# EAGLE board M0 DC Closed Loop Servo (EAGLE 8.0.0)
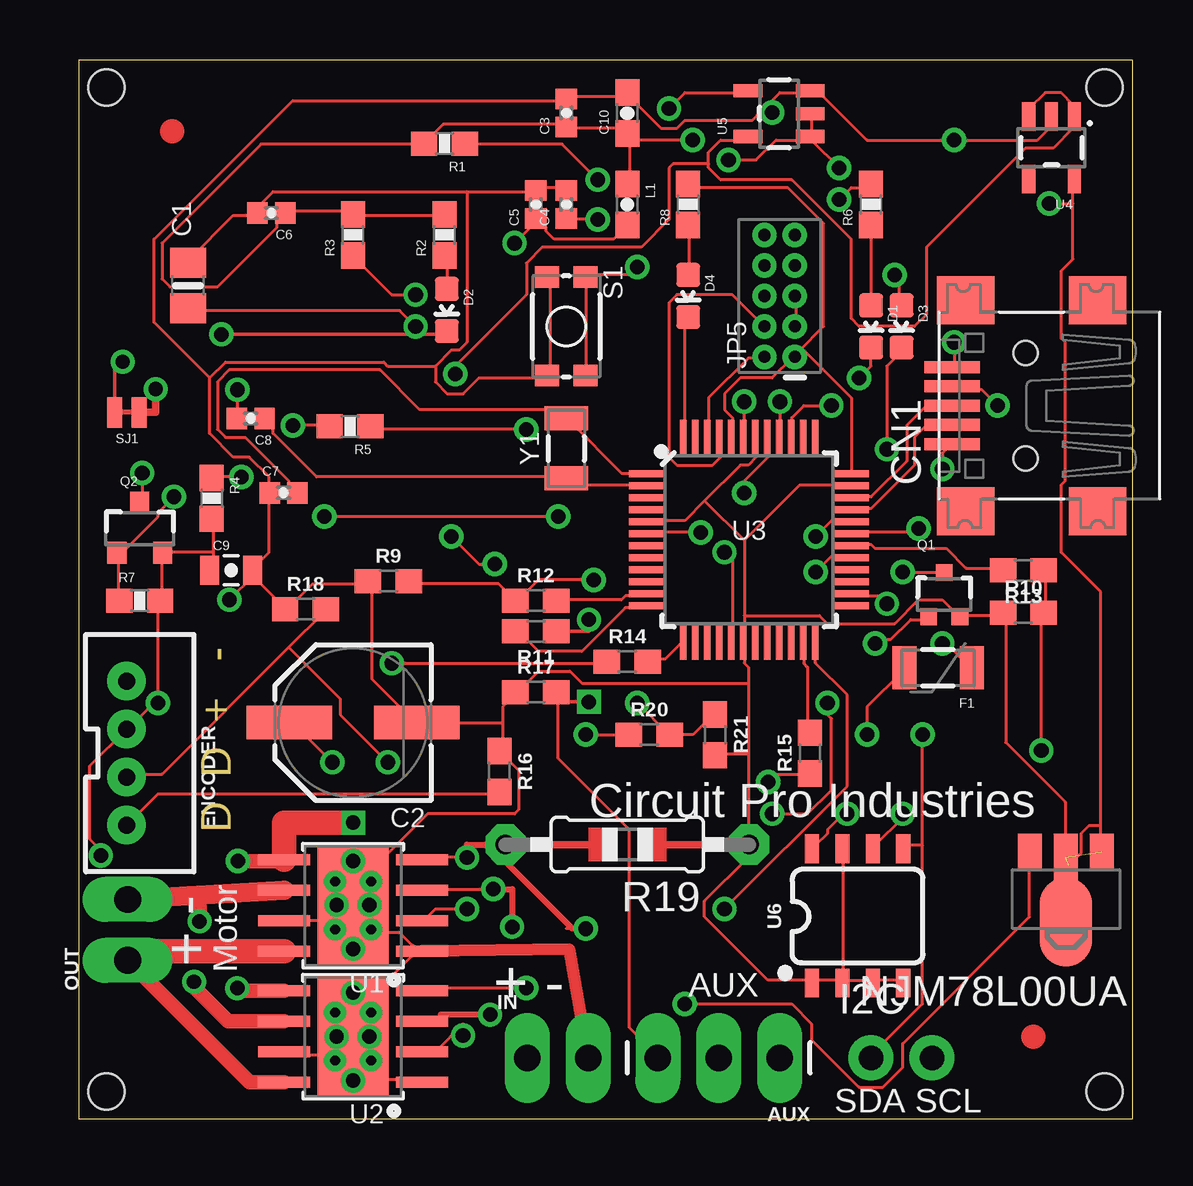
[diagram p0: board, top side]
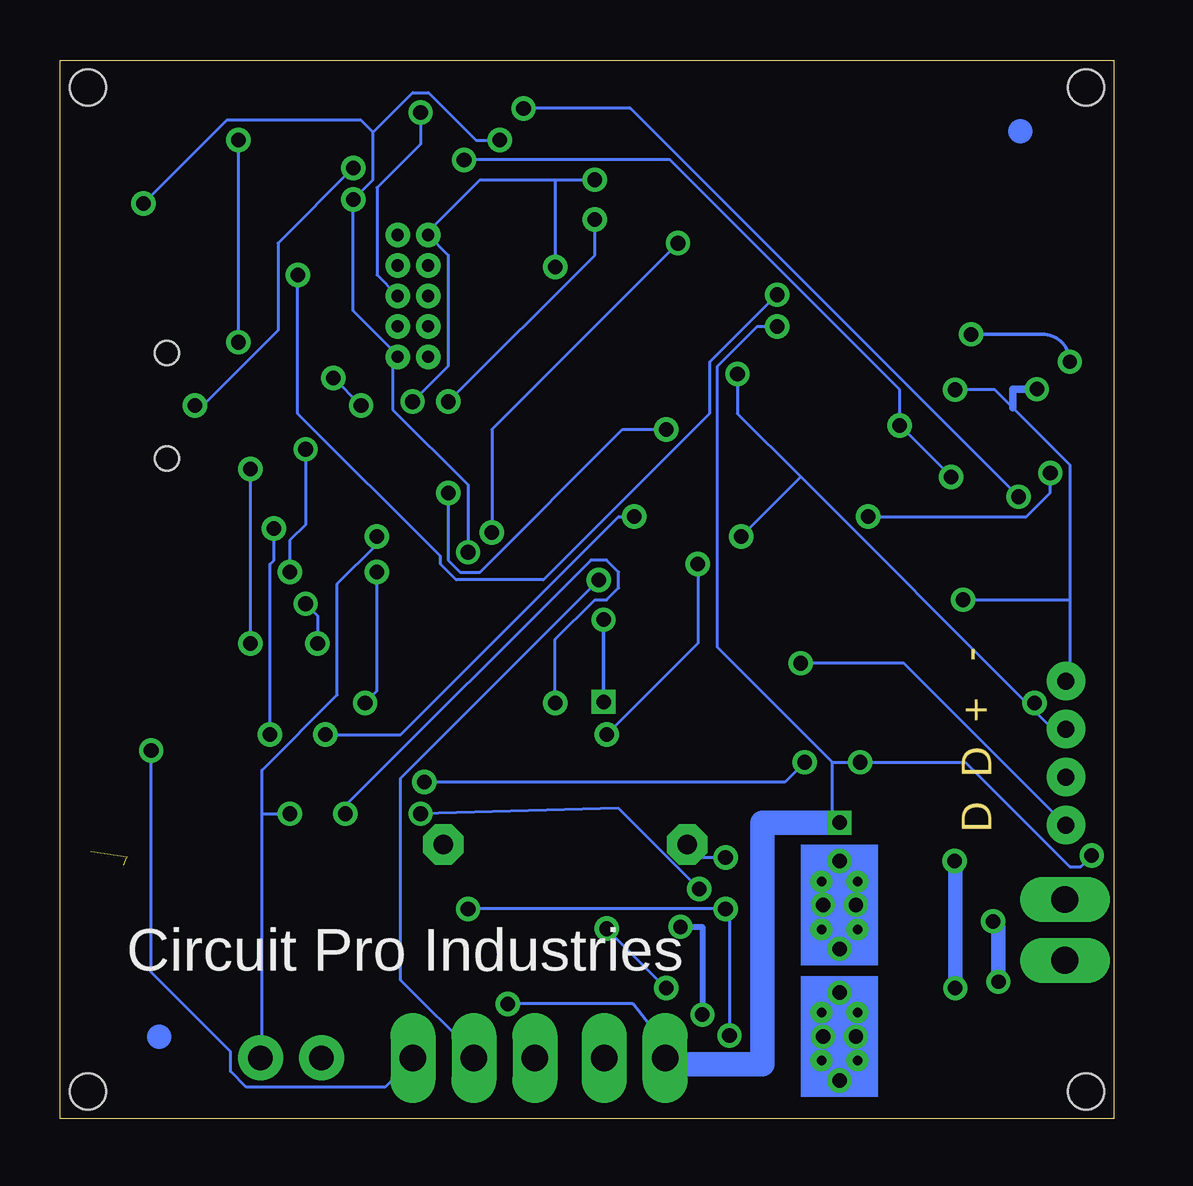
[diagram p1: board, bottom side, seen from below]

Size 43.92 x 44.12 mm. Coordinates in mm from the lower left corner, seen from the top.
Outline: 0,0 43.92,0 43.92,44.12 0,44.12 0,0
Copper layers (1*16): Top 0.035mm / dielectric 1.5mm / Bottom 0.035mm
Design rules "default *": minimum track width 5mil, minimum drill 24mil, track to track 8mil, track to pad 8mil, pad to pad 8mil, via to via 8mil, smd to smd 8mil, copper to edge 40mil, drill to drill 8mil, minimum pad ring 10mil, minimum via ring 8mil, stop-mask expansion 4mil, vias tented up to drill 0mil, thermal gap 10mil
Holes 1.5 mm at 42.75,42.98 1.14,42.98 1.14,1.14 42.75,1.14

## Footprints (pad centres in the part's own frame; a part is rotated, then mirrored left to right if it is on the bottom)
1X03_LONGPADS = drill 1.118 pad 1.88 long: 1 0,0; 2 2.54,0; 3 5.08,0
0805-NO = smd 1.24 x 1.5: 1 -0.95,0; 2 0.95,0
PANASONIC_D = smd 3.556 x 1.4: + 2.654,0; - -2.654,0
0402-CAP = smd 0.85 x 0.9: 1 -0.58,0; 2 0.58,0
0805-CAP = smd 0.8 x 1.2: 1 -0.9,0; 2 0.9,0
0603-CAP = smd 1.1 x 1: 1 -0.85,0; 2 0.85,0
USB-MINIB = smd 0.5 x 2.308: D+ 0,4.064; D- -0.8,4.064; GND 1.6,4.064; ID 0.8,4.064; VBUS -1.6,4.064 | smd 2 x 2.4: GND1 -4.4,-2; GND2 -4.4,3.5; GND3 4.4,3.5; GND4 4.4,-2 | hole 1: -2.2,1; 2.2,1
LED-0603 = smd 1 x 1: A 0,-0.877; C 0,0.877
JST-4-PTH-VERT = drill 0.7 pad 1.6: 1 -3,-0.55; 2 -1,-0.55; 3 1,-0.55; 4 3,-0.55
PTC-1206 = smd 1 x 1.8: 1 -1.4,0; 2 1.4,0
1X02_NO_SILK@1 = drill 1.016 pad 1.88: 1 0,0; 2 2.54,0
1X02_LONGPADS = drill 1.118 pad 1.88 long: 1 0,0; 2 2.54,0
2X5-PTH-1.27MM = drill 0.508 pad 1: 1 -2.54,-0.635; 2 -2.54,0.635; 3 -1.27,-0.635; 4 -1.27,0.635; 5 0,-0.635; 6 0,0.635; 7 1.27,-0.635; 8 1.27,0.635; 9 2.54,-0.635; 10 2.54,0.635
0603 = smd 1.1 x 1: 1 -0.85,0; 2 0.85,0
SOT89 = smd 1 x 1.5: 1 -1.499,-1.981; 3 1.499,-1.981 | smd 1 x 2: 2 0,-1.727 | smd 2.2 x 3.7: 2@1 0,0.94
SOT323 = smd 0.7 x 0.7: 1 -0.65,-0.925; 2 0.65,-0.925; 3 0,0.925
SOT23-3 = smd 0.8 x 0.9: 1 -0.95,-1; 2 0.95,-1; 3 0,1.1
0603-RES = smd 1.1 x 1: 1 -0.85,0; 2 0.85,0
0805-THM = drill 0.813 pad 1.676 octagon: 1 -5.08,0; 2 5.08,0
TACTILE_SWITCH_SMD_4.6X2.8MM = smd 0.9 x 1: 1 -2.05,-0.8; 2 2.05,-0.8; 3 2.05,0.8; 4 -2.05,0.8
PAD-JUMPER-2-NC_BY_TRACE_NO_SILK = smd 0.635 x 1.27: 1 -0.508,0; 2 0.508,0
HSOP8 = smd 0.45 x 2.15: 1 -1.905,-2.875; 2 -0.635,-2.875; 3 0.635,-2.875; 4 1.905,-2.875; 5 1.905,2.875; 6 0.635,2.875; 7 -0.635,2.875; 8 -1.905,2.875 | smd 4.9 x 2.95: GND 0,0 | drill 0.4: P$1 -1,0.75; P$2 -1,-0.75; P$3 1,-0.75; P$4 1,0.75
TQFP-48 = smd 1.5 x 0.28: 1 -4.25,2.75; 2 -4.25,2.25; 3 -4.25,1.75; 4 -4.25,1.25; 5 -4.25,0.75; 6 -4.25,0.25; 7 -4.25,-0.25; 8 -4.25,-0.75; 9 -4.25,-1.25; 10 -4.25,-1.75; 11 -4.25,-2.25; 12 -4.25,-2.75; 25 4.25,-2.75; 26 4.25,-2.25; 27 4.25,-1.75; 28 4.25,-1.25; 29 4.25,-0.75; 30 4.25,-0.25; 31 4.25,0.25; 32 4.25,0.75; 33 4.25,1.25; 34 4.25,1.75; 35 4.25,2.25; 36 4.25,2.75 | smd 0.28 x 1.5: 13 -2.75,-4.25; 14 -2.25,-4.25; 15 -1.75,-4.25; 16 -1.25,-4.25; 17 -0.75,-4.25; 18 -0.25,-4.25; 19 0.25,-4.25; 20 0.75,-4.25; 21 1.25,-4.25; 22 1.75,-4.25; 23 2.25,-4.25; 24 2.75,-4.25; 37 2.75,4.25; 38 2.25,4.25; 39 1.75,4.25; 40 1.25,4.25; 41 0.75,4.25; 42 0.25,4.25; 43 -0.25,4.25; 44 -0.75,4.25; 45 -1.25,4.25; 46 -1.75,4.25; 47 -2.25,4.25; 48 -2.75,4.25
SOT23-5 = smd 0.55 x 1.2: 1 -0.95,-1.3; 2 0,-1.3; 3 0.95,-1.3; 4 0.95,1.3; 5 -0.95,1.3
SO08 = smd 0.6 x 1.2: 1 -1.905,-2.8; 2 -0.635,-2.8; 3 0.635,-2.8; 4 1.905,-2.8; 5 1.905,2.8; 6 0.635,2.8; 7 -0.635,2.8; 8 -1.905,2.8
CRYSTAL-SMD-3.2X1.5MM = smd 1 x 1.8: P$1 -1.25,0; P$2 1.25,0

## Placement (x,y rotation side)
AUX  [1X03_LONGPADS]  29.21,2.54 180 top
C1  0.1uF/50V  [0805-NO]  4.55,34.72 90 top
C2  22uF/63V  [PANASONIC_D]  11.43,16.51 180 top
C3  0.1uF  [0402-CAP]  20.32,41.91 90 top
C4  0.1uF  [0402-CAP]  20.32,38.1 90 top
C5  0.1uF  [0402-CAP]  19.05,38.1 90 top
C6  0.1uF  [0402-CAP]  8.03,37.74 180 top
C7  15pF  [0402-CAP]  8.53,26.09 0 top
C8  15pF  [0402-CAP]  7.16,29.18 180 top
C9  1.0uF  [0805-CAP]  6.35,22.86 0 top
C10  2.2uF  [0603-CAP]  22.86,41.91 90 top
CN1  [USB-MINIB]  40.46,29.72 90 top
D1  GREEN  [LED-0603]  33.02,33.02 180 top
D2  RED  [LED-0603]  15.34,33.71 180 top
D3  BLUE  [LED-0603]  34.29,33.02 180 top
D4  Yellow  [LED-0603]  25.4,34.29 180 top
ENCODER  [JST-4-PTH-VERT]  2.54,15.24 270 top
F1  500mA  [PTC-1206]  35.81,18.8 180 top
I2C  [1X02_NO_SILK@1]  33.02,2.54 0 top
IN  [1X02_LONGPADS]  18.69,2.54 0 top
JP5  CORTEX_DEBUGPTH  [2X5-PTH-1.27MM]  29.21,34.29 90 top
L1  FB - 30Ohm  [0603]  22.86,38.1 270 top
NJM78L00UA  AP1117Y33G-13  [SOT89]  41.15,9.14 180 top
OUT  [1X02_LONGPADS]  2.03,6.6 90 top
Q1  2N7002PW  [SOT323]  36.07,21.84 0 top
Q2  2.5A/30V  [SOT23-3]  2.54,24.59 0 top
R1  10K  [0603-RES]  15.24,40.64 180 top
R2  330  [0603-RES]  15.24,36.83 90 top
R3  330  [0603-RES]  11.43,36.83 90 top
R4  100k  [0603-RES]  5.54,25.86 270 top
R5  330  [0603-RES]  11.3,28.85 180 top
R6  330  [0603-RES]  33.02,38.1 90 top
R7  47K  [0603-RES]  2.54,21.59 0 top
R8  330  [0603-RES]  25.4,38.1 90 top
R9  2.0k  [0603]  12.9,22.4 0 top
R10  2.0k  [0603]  39.37,21.08 0 top
R11  1k  [0603]  19.05,20.32 180 top
R12  1k  [0603]  19.05,21.59 0 top
R13  1k  [0603]  39.37,22.86 180 top
R14  1k  [0603]  22.86,19.05 0 top
R15  1k  [0603]  30.48,15.24 90 top
R16  2.0k  [0603]  17.53,14.48 270 top
R17  2.0k  [0603]  19.05,17.78 0 top
R18  2.0k  [0603]  9.45,21.23 0 top
R19  30K  [0805-THM]  22.86,11.43 180 top
R20  10k  [0603]  23.77,16 0 top
R21  10k  [0603]  26.52,16 270 top
S1  RESET  [TACTILE_SWITCH_SMD_4.6X2.8MM]  20.32,33.02 270 top
SJ1  PWR-LED  [PAD-JUMPER-2-NC_BY_TRACE_NO_SILK]  2.01,29.44 180 top
U1  DRV8871  [HSOP8]  11.43,8.89 90 top
U2  DRV8871  [HSOP8]  11.43,3.43 90 top
U3  ATSAMD21G-A  [TQFP-48]  27.94,24.13 0 top
U4  3.3V  [SOT23-5]  40.54,40.46 180 top
U5  74AHC1G125  [SOT23-5]  29.18,41.88 90 top
U6  24LC256  [SO08]  32.46,8.46 0 top
U$7  [CIRCLE-1MM-3R]  39.78,3.43 0 top
U$8  [CIRCLE-1MM-3R]  3.89,41.15 0 top
Y1  32.768kHz  [CRYSTAL-SMD-3.2X1.5MM]  20.32,27.94 90 top

## Library data of the parts
AUX I2C IN OUT = SparkFun-Connectors
C1 C2 U1 U2 = microbuilder
C3-C6 = SparkFun-Capacitors; PROD_ID: CAP-12416
C7 C8 = samd21-temp; PROD_ID: CAP-13063
C9 = SparkFun-Capacitors; PROD_ID: CAP-11625
C10 = SparkFun-Capacitors; PROD_ID: CAP-07888
CN1 R19 = adafruit
D1 = SparkFun-LED; PROD_ID: DIO-00821
D2 = SparkFun-LED; PROD_ID: DIO-00819
D3 = SparkFun-LED; PROD_ID: DIO-08575
D4 = SparkFun-LED; PROD_ID: DIO-09003
ENCODER = SparkFun-Connectors; PROD_ID: CONN-13251
F1 = SparkFun-PowerIC; PROD_ID: RES-11150
JP5 = samd21-temp
L1 = SparkFun-Passives; PROD_ID: RES-07859
NJM78L00UA = AP1117Y33G-13
Q1 = SparkFun-DiscreteSemi; PROD_ID: TRANS-11151
Q2 = SparkFun-DiscreteSemi; PROD_ID: TRANS-11308
R1 R20 R21 = SparkFun-Resistors; PROD_ID: RES-00824
R2 R3 R5 R6 R8 = SparkFun-Resistors; PROD_ID: RES-00818
R4 = SparkFun-Resistors; PROD_ID: RES-07828
R7 = SparkFun-Resistors; PROD_ID: RES-07871
R9 R10 R16-R18 = SparkFun-Resistors; PROD_ID: RES-08296
R11-R15 = SparkFun-Resistors; PROD_ID: RES-07856
S1 = samd21-temp; PROD_ID: SWCH-13065
SJ1 = SparkFun-Passives
U3 = samd21-temp; PROD_ID: IC-13064
U4 = SparkFun-PowerIC; PROD_ID: VREG-12457
U5 = SparkFun-DigitalIC; PROD_ID: IC-11920
U6 = SparkFun-IC-Memory; PROD_ID: IC-09714
U$7 U$8 = fiducial
Y1 = samd21-temp; PROD_ID: XTAL-13062

## Nets
3.3V: C3.1 C6.1 C10.1 JP5.1 L1.1 NJM78L00UA.2 NJM78L00UA.2@1 R1.2 R2.2 R3.2 R6.2 R8.2 U3.17 U3.36 U3.44 U4.5
!RESET: JP5.10 R1.1 S1.3 S1.4 U3.40
A0: U3.3
A1: U3.7
A2: U3.8
A3: U3.9
AREF: U3.4
D0/RXI: U3.16
D1/TXO: U3.15
D2: R15.2 U3.23
D3: U3.14
D4: R14.2 U3.13
D5: U1.2 U2.2 U3.24
D6: U1.3 U2.3 U3.29
D7: R13.2 U3.30
D8: R12.2 U3.11
D9: R11.2 U3.12
D10/SS: U3.27
D11/MOSI: U3.25
D12/MISO: U3.28
D13/SCK: Q1.1 U3.26
ENCODER: ENCODER.3 R15.1 R18.2
GND: C1.2 C2.- C3.2 C4.2 C5.2 C6.2 C7.1 C8.2 C9.2 C10.2 CN1.GND ENCODER.1 IN.2 JP5.3 JP5.5 NJM78L00UA.1 Q1.2 R9.1 R10.1 R16.1 R17.1 R18.1 R19.1 R21.2 S1.1 S1.2 SJ1.1 U1.1 U1.7 U1.GND U1.P$1 U1.P$2 U1.P$3 U1.P$4 U2.1 U2.7 U2.GND U2.P$1 U2.P$2 U2.P$3 U2.P$4 U3.5 U3.18 U3.35 U3.42 U4.2 U5.3 U6.1 U6.2 U6.3 U6.4 U6.7
MVIN: C1.1 C2.+ ENCODER.2 IN.1 NJM78L00UA.3 U1.5 U2.5
N$1: CN1.VBUS F1.1
N$2: C7.2 U3.1 Y1.P$2
N$3: D3.C Q1.3
N$4: C8.1 U3.2 Y1.P$1
N$5: D2.A R2.1
N$6: D3.A R3.1
N$7: F1.2 Q2.3
N$8: CN1.ID R4.1 R5.2 U5.1 U5.2
N$9: Q2.1 R7.1 U5.4
N$10: D1.A R6.1
N$11: D4.A R8.1
N$12: D2.C SJ1.2
N$14: AUX.3 R11.1 R17.2
N$15: R20.2 R21.1 U6.8
N$16: AUX.2 R9.2 R12.1
N$17: AUX.1 R10.2 R13.1
N$18: ENCODER.4 R14.1 R16.2
N$20: R19.2 U1.4 U2.4
OUT1: OUT.2 U1.6 U2.6
OUT2: OUT.1 U1.8 U2.8
RX_LED: D4.C U3.48
SCL: I2C.2 U3.32 U6.6
SDA: I2C.1 U3.31 U6.5
SWCLK: JP5.4 U3.45
SWDIO: JP5.2 U3.46
TX_LED: D1.C U3.39
USB_D+: CN1.D+ U3.34
USB_D-: CN1.D- U3.33
USB_HOST_EN: R5.1 U3.41
VDDANA: C5.1 L1.2 U3.6
VDDCORE: C4.1 U3.43
VIN: C9.1 Q2.2 R4.2 R7.2 R20.1 U4.1 U4.3 U5.5

## Tracks (layer width: path | path; a pad name or v marks a point on that pad's centre or on a via)
3.3V  (via drill 0.61)  (1 unrouted)
  Top 0.127: 41.44,38.14 41.44,35.83 40.95,35.33 40.95,32.52 41.11,32.36 41.11,26.58 40.95,26.42 40.95,23.61 42.6,21.96 42.6,12.22 | 41.44,38.14 41.44,39.13 U4.5 | 42.6,11.23 42.6,12.22 | R2.2 15.19,37.64 11.56,37.64 R3.2 11.39,37.81 8.75,37.81 C6.1 8.59,37.64 8.26,37.31 8.26,37.15 5.78,34.67 3.8,34.67 3.47,35 3.47,36.49 7.59,40.62 14.36,40.62 R1.2 14.53,40.78 15.19,41.44 20.31,41.44 C3.1 20.47,41.27 22.62,41.27 22.78,41.11 C10.1 | 22.95,40.78 22.95,40.95 C10.1 | 22.95,40.78 22.95,38.96 L1.1 | 30.05,32.03 29.88,31.86 JP5.1 | 30.05,32.03 31.04,33.02 31.04,37.31 29.55,38.8 25.43,38.8 R8.2 | v31.7,38.3 32.19,38.8 33.02,38.8 R6.2 | v26.91,23.61 27.24,23.28 27.24,19.98 U3.17 | 30.05,32.03 30.21,32.03 32.19,30.05 32.19,26.91 U3.36 | 30.05,32.03 JP5.1 | U3.44 27.24,28.4 27.24,29.22 26.91,29.55 26.91,30.21 27.57,30.87 28.89,30.87 29.72,31.7 JP5.1 | v25.59,40.78 22.95,40.78 | 22.95,40.78 C10.1 | v40.45,38.14 41.44,38.14 | 42.6,12.22 42.1,12.22 41.77,11.89 41.77,11.06 41.27,10.57 41.27,8.26 NJM78L00UA.2@1
  Bottom 0.127: v26.91,23.61 26.91,26.42 30.05,29.55 30.05,31.53 29.88,31.7 JP5.1 29.88,31.86 31.7,33.68 v31.7,38.3 30.87,39.13 30.87,41.11 | v25.59,40.78 26.58,40.78 28.56,42.76 29.22,42.76 30.87,41.11 | v40.45,38.14 36.98,41.6 31.37,41.6 30.87,41.11
!RESET  (via drill 0.61)
  Top 0.127: S1.3 21.13,31.04 21.13,35 S1.4 21.13,35.17 22.95,35.17 v23.28,35.5 | v21.63,39.13 20.14,40.62 16.18,40.62 R1.1 | v29.22,29.88 29.22,28.4 U3.40
  Bottom 0.127: 23.28,39.13 26.42,39.13 28.56,36.98 JP5.10 27.74,35.99 27.74,31.37 v29.22,29.88 | 23.28,39.13 v21.63,39.13 | 23.28,39.13 v23.28,35.5
D2
  Top 0.127: R15.2 30.38,16.18 30.38,18.82 30.21,18.99 30.21,19.81 U3.23
D4
  Top 0.127: R14.2 23.77,19.15 24.43,19.15 25.09,19.81 U3.13
D5  (via drill 0.61)
  Top 0.127: v26.91,8.75 32.03,13.87 32.03,17.67 30.71,18.99 30.71,19.81 U3.24 | v16.18,8.75 14.86,8.75 14.36,8.26 U1.2 | v16.02,3.48 16.02,3.96 14.86,2.81 14.36,2.81 U2.2
  Bottom 0.127: v26.91,8.75 v16.18,8.75 16.02,8.59 v16.02,3.48
D6  (via drill 0.6, 0.61)
  Top 0.127: v30.71,22.78 31.37,23.44 32.03,23.44 U3.29 | v31.2,17.34 31.2,16.84 31.37,16.68 31.37,13.7 30.38,12.71 v28.89,12.71 | v17.27,9.58 14.36,9.58 U1.3
  Top 0.254: v17.27,9.58 18.06,9.58 v18.06,8 | v17.14,4.34 15.09,4.34 15.09,4.12 14.3,4.12 U2.3
  Bottom 0.127: v30.71,22.78 30.71,17.83 v31.2,17.34 | v28.89,12.71 20.64,12.94 v17.27,9.58
  Bottom 0.254: v18.06,8 17.14,8 v17.14,4.34
D7
  Top 0.127: R13.2 38.47,22.95 36.98,22.95 36.16,23.77 33.19,23.77 33.02,23.94 32.19,23.94 U3.30
D8
  Top 0.127: R12.2 19.98,21.63 22.62,21.63 22.78,21.79 23.61,21.79 U3.11
D9
  Top 0.127: R11.2 18.33,20.31 19.15,19.48 20.97,19.48 22.78,21.3 23.61,21.3 U3.12
D13/SCK  (via drill 0.61)
  Top 0.127: v33.19,19.81 33.35,19.98 33.85,19.98 34.67,20.8 35.33,20.8 Q1.1 | v33.68,21.46 33.35,21.79 32.19,21.79 U3.26
  Bottom 0.127: v33.19,19.81 33.19,20.97 v33.68,21.46
ENCODER  (via drill 0.61)
  Top 0.127: 8.75,19.65 3.47,14.36 2.15,14.36 ENCODER.3 | 8.75,19.65 10.24,21.13 R18.2 | v28.73,14.03 29.06,14.36 30.38,14.36 R15.1 | v12.88,14.86 10.9,16.84 10.9,17.5 8.75,19.65
  Bottom 0.127: v28.73,14.03 13.7,14.03 v12.88,14.86
GND  (via drill 0.6, 0.61)  (1 unrouted)
  Top 0.127: 26.09,25.76 27.57,27.24 27.9,27.24 28.23,27.57 28.23,28.23 U3.42 | 26.09,25.76 25.26,24.93 23.77,24.93 U3.5 | 27.74,24.11 27.74,20.97 | 27.74,20.97 27.74,19.98 U3.18 27.74,19.81 27.74,18.99 27.9,18.82 27.9,18.16 | 26.09,25.76 27.74,24.11 | 27.74,24.11 30.05,26.42 32.03,26.42 U3.35 | 27.74,20.97 30.87,20.97 31.2,20.64 34.01,20.64 35,21.63 35.99,21.63 36.65,20.97 Q1.2 36.82,20.97 38.47,20.97 R10.1 38.63,20.97 38.63,15.68 41.11,13.21 41.11,10.9 | 27.9,18.16 27.9,15.19 | 27.9,15.19 27.9,11.56 R19.1 27.9,11.39 27.9,10.9 26.09,9.08 26.09,8.42 28.73,5.78 30.54,5.78 U6.1 30.71,5.78 31.7,5.78 U6.2 31.86,5.78 | JP5.3 29.88,33.02 29.88,34.18 JP5.5 | 28.4,41.94 28.07,41.6 25.26,41.6 24.93,41.27 24.27,41.27 22.95,42.6 C10.2 22.78,42.6 20.47,42.6 C3.2 20.31,42.43 8.91,42.43 3.14,36.65 3.14,33.19 5.45,30.87 | 28.4,41.94 29.22,42.76 30.38,42.76 U5.3 30.54,42.76 30.87,42.76 32.85,40.78 v36.49,40.78 39.95,40.78 40.45,41.27 40.45,41.6 U4.2 | v36.49,32.36 36.49,31.37 CN1.GND | 28.4,41.94 v28.89,41.94 | S1.1 19.65,35 19.65,31.04 S1.2 19.48,30.87 16.68,30.87 16.02,30.21 15.35,30.21 14.86,30.71 14.86,31.37 | C4.2 20.31,38.8 19.15,38.8 C5.2 18.99,38.63 16.18,38.63 | C1.2 4.62,35.83 6.44,37.64 7.43,37.64 C6.2 7.59,37.81 7.59,38.14 8.09,38.63 16.18,38.63 | 14.86,31.37 15.52,32.03 15.85,32.03 16.18,32.36 16.18,38.63 | v6.6,30.38 6.6,29.22 C8.2 | 11.39,8.59 11.56,8.75 U1.GND | 11.39,8.59 10.73,7.92 U1.P$1 10.57,7.92 10.24,8.26 U1.7 | 11.39,9.08 11.56,8.91 U1.GND | 11.39,9.08 10.73,9.74 U1.P$4 | 11.39,8.59 12.05,7.92 U1.P$2 12.22,7.76 13.37,7.76 13.87,7.26 U1.1 13.87,6.77 12.22,5.12 12.22,4.46 U2.P$3 12.05,4.29 11.39,3.63
  Top 0.127: 11.39,8.59 U1.GND | 11.39,9.08 12.05,9.74 U1.P$3 12.22,9.91 12.22,10.4 14.53,12.71 18.16,12.71 18.33,12.88 18.33,14.53 17.67,15.19 R16.1 17.67,15.35 17.67,16.51 | 11.39,9.08 U1.GND | 7.92,26.09 7.92,23.61 7.26,22.95 C9.2 | 7.26,22.62 7.1,22.78 C9.2 | 7.26,22.62 8.59,21.3 R18.1 8.75,21.3 9.74,22.29 12.05,22.29 R9.1 12.22,22.29 12.22,18.33 14.03,16.51 C2.- 17.67,16.51 | 17.67,16.51 17.67,17.17 18.16,17.67 R17.1 18.33,17.83 19.15,18.66 20.47,18.66 20.97,18.16 27.9,18.16 | 7.26,22.62 v6.27,21.63 | 7.26,22.62 C9.2 | 14.86,31.37 12.88,31.37 12.71,31.53 6.11,31.53 5.45,30.87 | 5.45,30.87 5.45,28.56 6.44,27.57 7.1,27.57 7.92,26.75 7.92,26.09 | 7.92,26.09 C7.1 | 11.39,3.14 11.56,3.3 U2.GND | 11.39,3.14 10.73,2.48 U2.P$1 10.57,2.48 10.4,2.64 8.59,2.64 U2.7 | 11.39,3.63 11.56,3.47 U2.GND | 11.39,3.63 10.73,4.29 U2.P$4 | 11.39,3.14 12.05,2.48 U2.P$2 12.22,2.31 12.88,1.65 14.2,1.65 U2.1 | 11.39,3.14 U2.GND | 11.39,3.63 U2.GND | U6.4 34.34,5.78 33.19,5.78 U6.3 33.02,5.78 31.86,5.78 | 27.9,15.19 26.58,15.19 R21.2 | 31.86,5.78 31.86,11.23 U6.7
  Top 0.305: SJ1.1 3.2,29.44 v3.2,30.4
  Top 0.508: IN.2 20.45,7.06 U1.1
  Bottom 0.127: v36.49,40.78 v36.49,32.36 | v28.89,41.94 28.89,40.62 30.71,38.8 30.71,35.17 29.88,34.34 JP5.5 | v6.6,30.38 4.95,30.38 4.2,29.63 1.82,27.24 1.82,21.63 | 1.82,21.63 1.82,18.49 1.98,18.33 ENCODER.1 | v6.27,21.63 1.82,21.63
  Bottom 0.305: v3.2,30.4 4.2,30.4 4.2,29.63
MVIN  (via drill 0.6, 0.61)
  Top 0.127: v14.03,33.02 13.37,33.68 4.62,33.68 C1.1 | v25.26,4.79 29.72,4.79 30.54,3.96 30.54,3.3 32.52,1.32 33.52,1.32 34.34,2.15 34.34,3.14 39.62,8.42 39.62,11.06 NJM78L00UA.3 | v10.57,14.86 8.91,16.51 C2.+ | v6.6,5.45 8.42,5.45 U2.5 | v0.91,10.97 0.91,11.2 0.46,11.66 0.46,14.71 ENCODER.2
  Top 0.61: U2.5 6.72,5.33 v6.6,5.45 | v6.63,10.74 8.5,10.74 U1.5
  Top 1.016: v11.43,12.34 8.55,12.34 U1.5
  Bottom 0.127: v14.03,33.02 14.86,33.02 16.51,31.37 16.51,19.65 11.72,14.86 | 11.72,14.86 11.72,12.71 v11.43,12.34 | v25.26,4.79 20.04,4.79 19.14,3.66 IN.1 | 11.72,14.86 v10.57,14.86 6.17,14.86 1.83,10.52 1.37,10.52 v0.91,10.97
  Bottom 0.61: v6.6,5.45 6.6,10.72 v6.63,10.74
  Bottom 1.016: v11.43,12.34 14.63,12.34 14.63,2.29 17.78,2.29 IN.1
N$1  (via drill 0.61)
  Top 0.127: v35.99,19.81 36.16,19.81 37.15,18.82 F1.1 | v35.99,27.08 35.99,27.74 36.32,28.07 CN1.VBUS
  Bottom 0.127: v35.99,27.08 v35.99,19.81
N$2
  Top 0.127: C7.2 9.08,26.09 8.75,26.42 8.75,26.58 6.93,28.4 6.11,28.4 5.78,28.73 5.78,30.71 6.27,31.2 12.55,31.2 14.2,29.55 19.98,29.55 20.31,29.22 Y1.P$2 20.47,29.06 22.62,26.91 23.61,26.91 U3.1
N$3  (via drill 0.61)
  Top 0.127: v34.34,22.78 35.99,22.78 Q1.3 | v33.68,27.9 33.68,31.37 34.34,32.03 D3.C
  Bottom 0.127: v34.34,22.78 34.34,24.11 33.68,24.77 v33.68,27.9
N$4
  Top 0.127: C8.1 7.76,29.06 8.09,28.73 8.09,28.56 9.91,26.75 20.31,26.75 Y1.P$1 20.47,26.58 20.64,26.42 23.61,26.42 U3.2
N$5
  Top 0.127: D2.A 15.35,34.67 15.35,35.83 R2.1
N$6  (via drill 0.61)
  Top 0.127: v34.01,35.17 34.18,35 34.18,34.01 D3.A | v14.03,34.34 13.04,34.34 11.56,35.83 R3.1
  Bottom 0.127: v34.01,35.17 34.01,29.39 28.07,23.44 28.07,23.11 27.41,22.45 23.77,22.45 16.84,29.39 16.84,31.53 v14.03,34.34
N$7  (via drill 0.61)
  Top 0.127: v2.64,26.91 2.64,25.76 Q2.3 | v19.98,25.09 v10.24,25.09 | v32.85,16.02 32.85,17.17 34.34,18.66 F1.2
  Bottom 0.127: v2.64,26.91 2.64,26.09 3.63,25.09 v10.24,25.09 | v19.98,25.09 20.64,25.09 29.72,16.02 v32.85,16.02
N$8  (via drill 0.61)
  Top 0.127: U5.1 30.54,40.95 30.54,41.77 U5.2 | v6.77,26.75 5.61,26.75 R4.1 | v8.91,28.89 10.4,28.89 R5.2 | v27.08,39.95 28.23,39.95 29.06,40.78 30.38,40.78 U5.1 | v38.3,29.72 37.64,30.38 36.49,30.38 CN1.ID | v31.7,39.62 30.54,40.78 U5.1
  Bottom 0.127: v6.77,26.75 v8.91,28.89 8.91,30.38 18.49,39.95 v27.08,39.95 | v38.3,29.72 37.97,29.72 34.84,32.85 34.84,36.49 v31.7,39.62
N$9  (via drill 0.61)
  Top 0.127: 1.65,23.44 1.65,21.63 R7.1 | v24.6,42.1 25.26,42.76 27.74,42.76 U5.4 | v3.96,25.92 3.3,25.26 3.3,25.09 1.65,23.44 | 1.65,23.44 Q2.1
  Bottom 0.127: v24.6,42.1 20.14,42.1 v3.96,25.92
N$10
  Top 0.127: R6.1 D1.A
N$11
  Top 0.127: D4.A 25.43,35.33 25.43,37.15 R8.1
N$12  (via drill 0.6)
  Top 0.152: D2.C 15.34,32.69 v5.94,32.69 | v1.83,31.55 1.5,31.55 SJ1.2
  Bottom 0.152: v5.94,32.69 2.97,32.69 arc90 v1.83,31.55
N$14  (via drill 0.6)
  Top 0.127: R17.2 19.98,17.67 19.98,15.02 22.95,12.05 22.95,3.8 24.11,2.64 AUX.3
  Top 0.152: R17.2 19.9,17.37 v21.26,17.37 | v21.26,20.8 21.26,20.32 R11.1
  Bottom 0.152: v21.26,17.37 v21.26,20.8
N$15  (via drill 0.61)
  Top 0.127: R21.1 26.42,16.84 25.59,16.02 24.77,16.02 R20.2 24.6,16.02 v23.28,17.34 | v32.03,12.71 31.86,12.71 31.2,12.05 31.2,11.89 30.71,11.39 U6.8
  Bottom 0.127: v32.03,12.71 32.03,13.04 21.79,23.28 21.13,23.28 20.64,22.78 20.64,22.12 21.13,21.63 21.63,21.63 23.28,19.98 v23.28,17.34
N$16  (via drill 0.61)
  Top 0.127: R9.2 13.87,22.29 17.5,22.29 18.16,21.63 R12.1 18.33,21.63 19.15,22.45 v21.46,22.45
  Bottom 0.127: v21.46,22.45 29.72,14.2 29.72,5.78 26.58,2.64 AUX.2
N$17  (via drill 0.61)
  Top 0.127: R13.1 40.28,22.78 40.28,21.13 R10.2 40.12,20.97 v40.12,15.35
  Bottom 0.127: v40.12,15.35 40.12,6.11 36.82,2.81 36.82,1.98 36.16,1.32 30.38,1.32 29.22,2.48 AUX.1
N$18  (via drill 0.61)
  Top 0.127: R16.2 17.5,13.54 3.3,13.54 2.15,12.38 ENCODER.4 | v13.04,18.99 21.96,18.99 R14.1
  Bottom 0.127: v13.04,18.99 8.75,18.99 2.15,12.38 ENCODER.4
N$19  (via drill 0.6)
  other vias: 11.43,5.26
N$20  (via drill 0.61)
  Top 0.127: v16.18,10.9 14.36,10.9 U1.4 | v18.66,5.45 14.36,5.45 U2.4 | 20.31,7.92 20.57,7.92 v21.13,7.92
  Top 0.254: v16.18,10.9 16.18,11.43 R19.2 17.78,10.72 20.57,7.92
  Bottom 0.127: 17.17,10.9 v16.18,10.9 | 17.67,11.39 R19.2 | v21.13,7.92 v18.66,5.45
N$21  (via drill 0.6)
  other vias: 12.12,8.92
N$22  (via drill 0.6)
  other vias: 10.74,8.92
N$23  (via drill 0.6)
  other vias: 11.43,7.09
N$24  (via drill 0.6)
  other vias: 11.43,10.74
N$25  (via drill 0.6)
  other vias: 12.12,3.43
N$26  (via drill 0.6)
  other vias: 10.74,3.43
N$27  (via drill 0.6)
  other vias: 11.43,1.6
OUT1  (via drill 0.6)
  Top 0.61: U2.6 6.22,4.06 4.8,5.49 v4.8,5.71 | v5.03,8.23 5.03,8.84 4.58,9.29
  Top 0.813: OUT.2 4.58,9.29 U1.6
  Bottom 0.61: v4.8,5.71 4.8,8 v5.03,8.23
OUT2
  Top 0.127: 7.92,1.65 8.42,1.65 U2.8
  Top 0.61: U2.8 7.11,1.52 OUT.1
  Top 1.016: OUT.1 2.41,6.99 U1.8
RX_LED
  Top 0.127: D4.C 25.26,33.35 25.26,28.4 U3.48
SCL  (via drill 0.61)
  Top 0.127: v30.71,24.27 31.37,24.93 32.03,24.93 U3.32 | v34.34,12.71 34.34,12.55 33.19,11.39 U6.6
  Bottom 0.127: v30.71,24.27 30.71,23.94 32.36,22.29 32.36,17.67 35.5,14.53 35.5,12.71 | 35.5,12.71 35.5,2.64 I2C.2 | 35.5,12.71 v34.34,12.71
SDA  (via drill 0.61)
  Top 0.127: v35,24.6 34.84,24.43 32.19,24.43 U3.31 | 35.17,11.39 35.17,4.79 33.02,2.64 I2C.1 | 35.17,11.39 v35.17,16.02 | 35.17,11.39 34.51,11.39 U6.5
  Bottom 0.127: v35,24.6 35,23.28 35.17,23.11 v35.17,16.02
SWCLK
  Top 0.127: U3.45 26.75,28.23 26.75,27.57 26.42,27.24 24.93,27.24 24.6,27.57 24.6,34.01 24.93,34.34 27.24,34.34 JP5.4
SWDIO
  Top 0.127: U3.46 26.25,28.4 26.25,30.05 27.9,31.7 28.56,31.7 JP5.2
TX_LED  (via drill 0.61)
  Top 0.127: D1.C 33.02,31.37 v32.52,30.87 | v31.37,29.72 30.21,29.72 29.72,29.22 29.72,28.4 U3.39
  Bottom 0.127: v31.37,29.72 v32.52,30.87
USB_D+
  Top 0.127: CN1.D+ 35.33,29.72 34.51,28.89 34.51,27.41 33.02,25.92 32.19,25.92 U3.34
USB_D-
  Top 0.127: U3.33 32.19,25.43 33.02,25.43 34.84,27.24 34.84,28.4 35.33,28.89 36.32,28.89 CN1.D-
USB_HOST_EN  (via drill 0.61)
  Top 0.127: v18.66,28.73 12.22,28.73 R5.1 | v27.74,26.09 27.74,26.58 28.73,27.57 28.73,28.23 U3.41
  Bottom 0.127: v18.66,28.73 20.47,28.73 26.42,22.78 27.24,22.78 27.74,23.28 v27.74,26.09
VDDANA  (via drill 0.61)
  Top 0.127: 19.15,37.48 19.48,37.15 19.48,36.98 19.81,36.65 22.29,36.65 22.78,37.15 L1.2 | v25.92,24.43 23.77,24.43 U3.6 | 19.15,37.48 v18.16,36.49 | 19.15,37.48 C5.1
  Bottom 0.127: v25.92,24.43 25.92,28.73 v18.16,36.49
VDDCORE  (via drill 0.61)
  Top 0.127: v21.63,37.48 20.47,37.48 C4.1 | v27.74,29.88 27.74,28.4 U3.43
  Bottom 0.127: v21.63,37.48 21.63,35.99 v27.74,29.88
VIN  (via drill 0.61)
  Top 0.127: 5.61,23.61 5.61,22.95 C9.1 | 5.61,23.61 5.61,24.93 R4.2 | 5.61,23.61 3.63,23.61 Q2.2 3.47,23.44 3.47,21.63 R7.2 3.3,21.46 3.3,17.5 3.14,17.34 | 2.15,16.34 3.14,17.34 | 26.25,39.79 26.25,39.62 26.75,39.13 29.72,39.13 32.19,36.65 32.19,33.35 32.52,33.02 34.84,33.02 35.33,33.52 35.33,36.32 39.46,40.45 40.62,40.45 41.44,41.27 41.44,41.6 U4.1 41.44,41.77 41.44,42.27 40.95,42.76 40.28,42.76 39.62,42.1 39.62,41.77 U4.3 | 26.25,39.79 26.25,40.28 26.75,40.78 27.74,40.78 U5.5 | v15.68,31.04 15.68,31.37 18.66,34.34 18.66,35.66 19.32,36.32 23.44,36.32 24.6,37.48 24.6,39.62 24.77,39.79 26.25,39.79 | v3.3,17.34 3.14,17.34 | v21.13,16.02 22.78,16.02 R20.1 | v17.34,23.11 16.68,23.11 v15.52,24.27
  Bottom 0.127: 2.15,16.34 2.64,16.34 3.47,17.17 | 13.04,26.75 15.68,29.39 v15.68,31.04 | 13.04,26.75 3.47,17.17 | 3.47,17.17 v3.3,17.34 | v21.13,16.02 17.34,19.81 v17.34,23.11 | 13.04,26.75 v15.52,24.27
(copper drawn outside any net)
  shapes: Bottom area x2

## Text on the board
Dimension: D D + -
tPlace: Circuit Pro Industries | + - | Motor | + - | AUX | SDA SCL
bPlace: Circuit Pro Industries